# Altium PCB PCB1.PcbDoc
Units mil, origin at the board's own origin, x right, y up, seen from the top; angles counter-clockwise.
Board outline 6000 x 4000 mil, 2 copper layers (Top Layer, Bottom Layer); 16 components, 9 nets, 78 pads, 0 vias.
Unrouted connection lines stored in the file: 20.
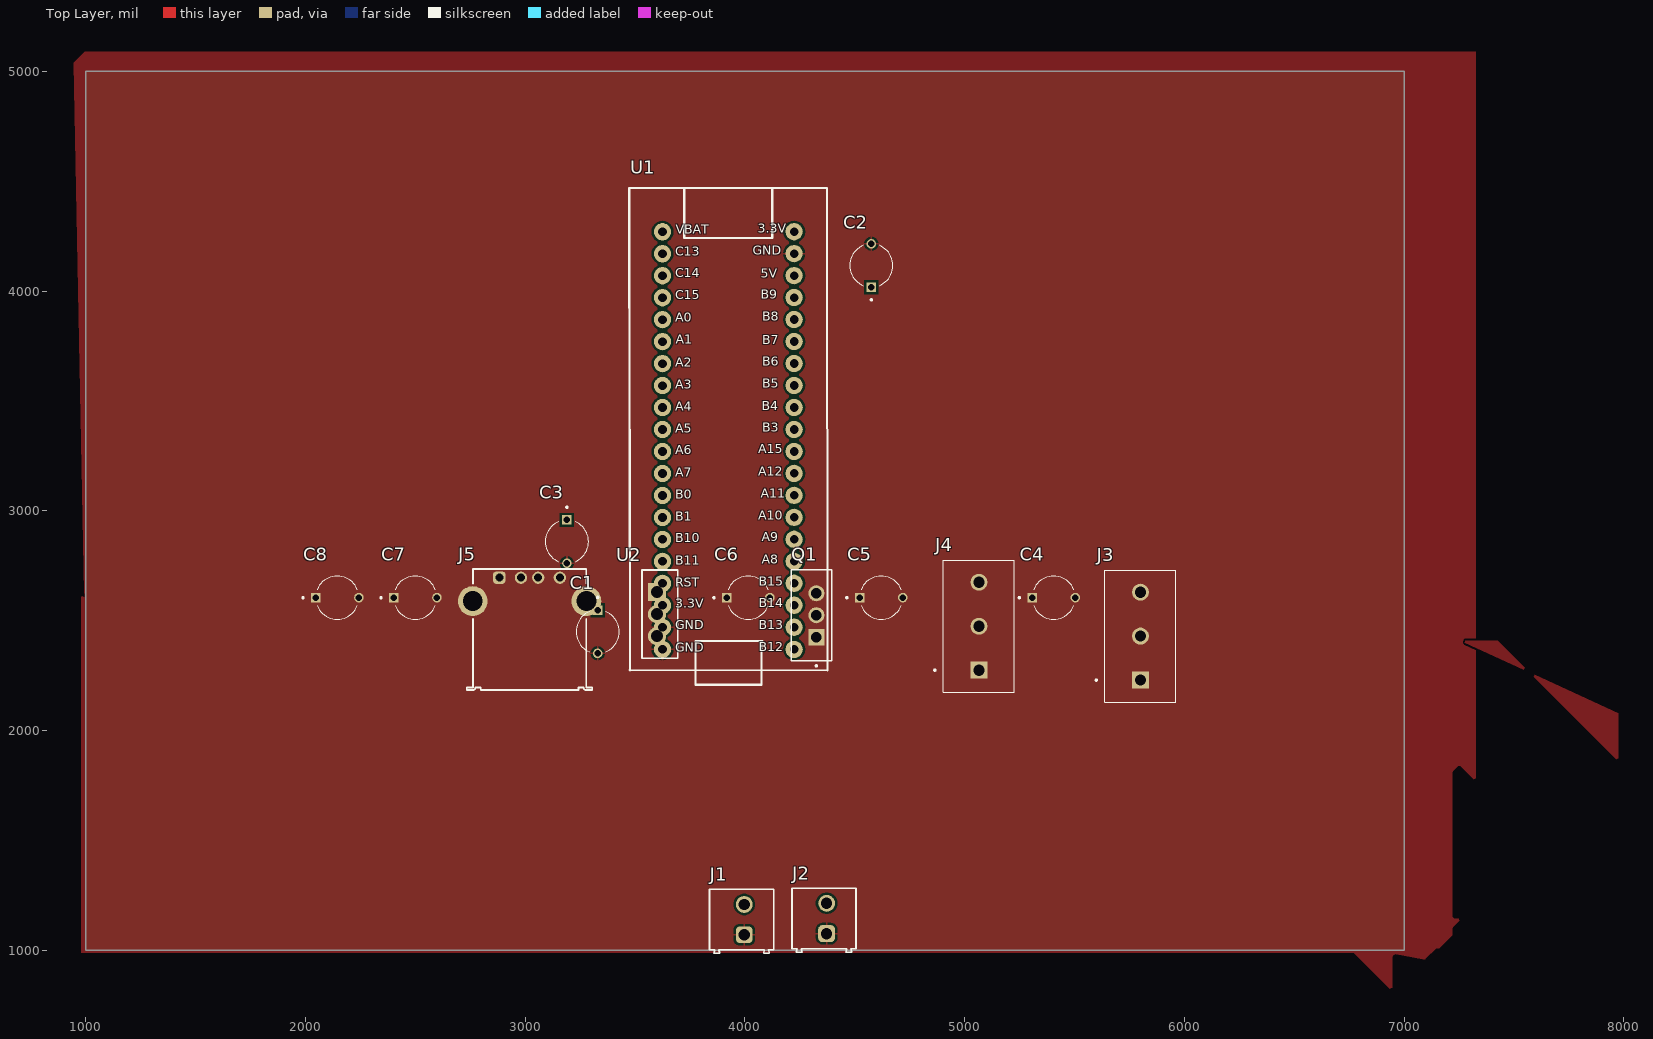
[diagram p0: Top Layer view]
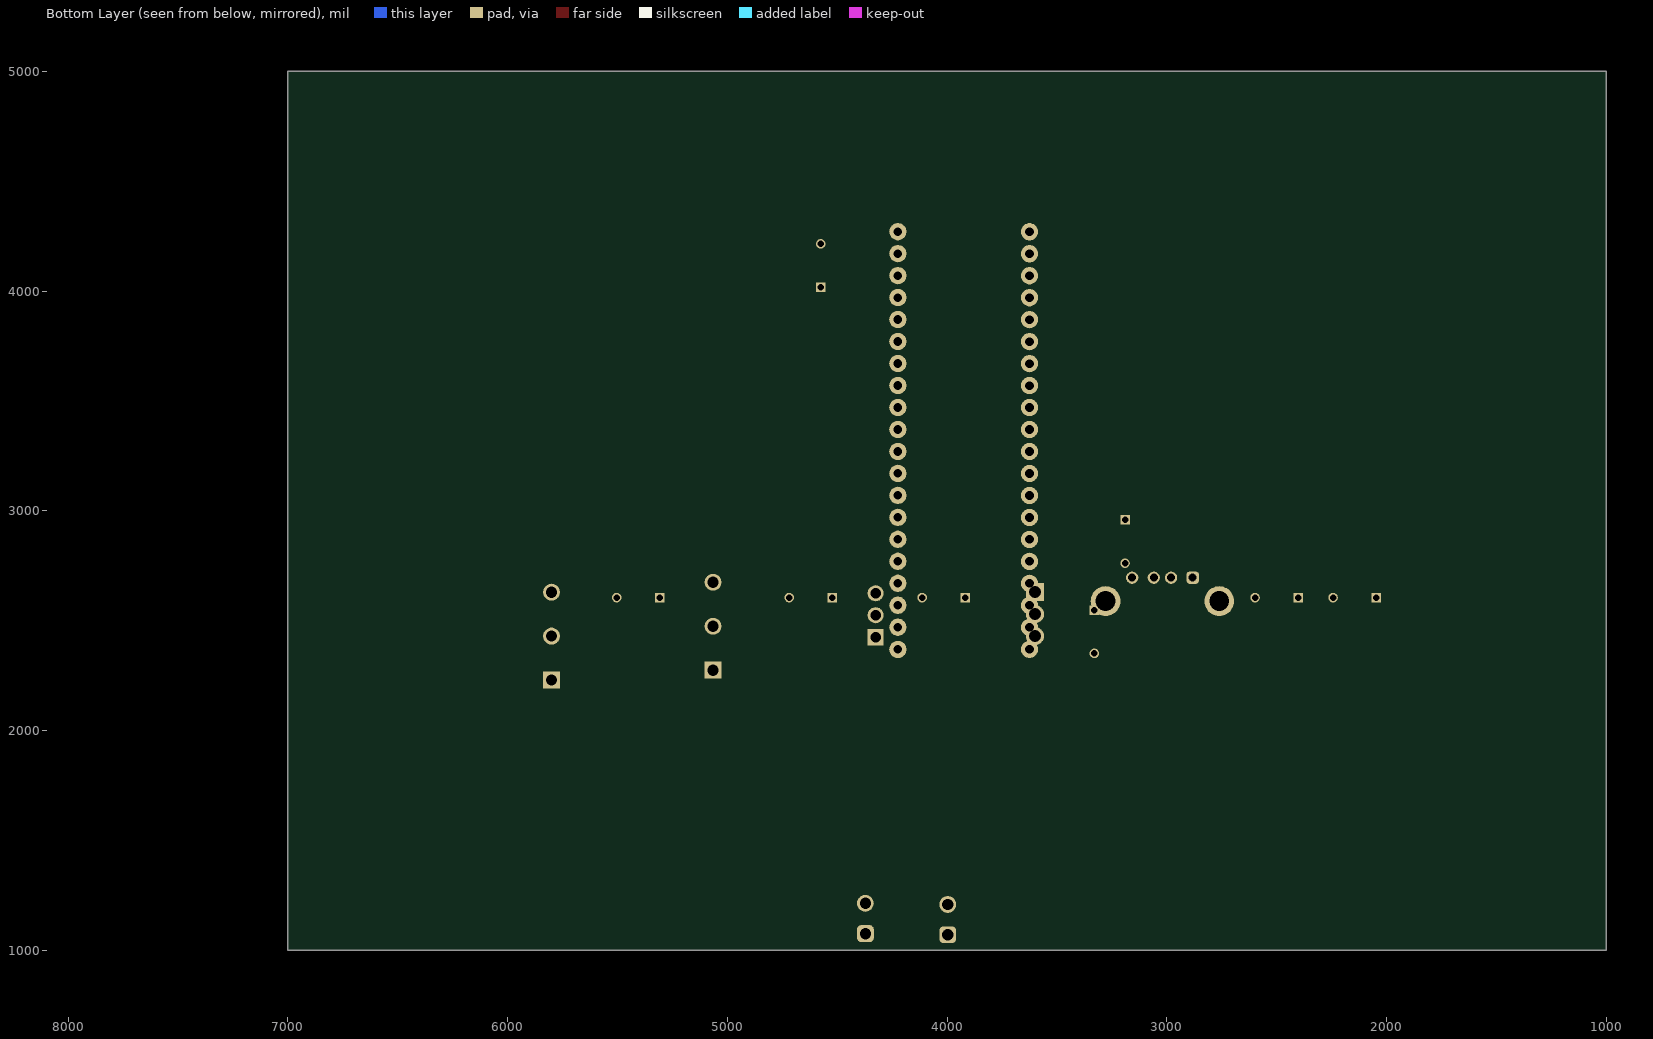
[diagram p1: Bottom Layer view, seen from below]

## Layer stack, top to bottom
Top Solder: solder mask 0.4, Solder Resist, Dk 3.5
Top Layer: signal copper 1.4
Dielectric 1: dielectric 12.6, FR-4, Dk 4.8
Bottom Layer: signal copper 1.4
Bottom Solder: solder mask 0.4, Solder Resist, Dk 3.5

## Board outline
1000,1000 7000,1000 7000,5000 1000,5000

## Design rules (kind name [scope] priority, off if disabled: settings)
Clearance [All] p1: gap=10 ignorepadtopadclearanceinfootprint=FALSE
PolygonConnect [All] p1: connectstyle=Relief reliefconductorwidth=10 reliefentries=4 polygonreliefangle="90 Angle" airgapwidth=10
RoutingVias [All] p1: holewidth=28 width=50 viastyle="Through Hole" minholewidth=28 minwidth=50 maxholewidth=28 maxwidth=50
SolderMaskExpansion [All] p1: expansion=4 istentingtop=FALSE
SupplyNets "Schematic Supply Nets_4" [InNet('+12')] p1: voltage=0.000
SupplyNets "Schematic Supply Nets_3" [InNet('8.4V')] p2: voltage=0.000
SupplyNets "Schematic Supply Nets_2" [InNet('+5')] p3: voltage=0.000
SupplyNets "Schematic Supply Nets_1" [InNet('3.3V')] p4: voltage=0.000
SupplyNets "Schematic Supply Nets" [InNet('GND')] p5: voltage=0.000
Width [All] p1: maxlimit=10 minlimit=10 preferedwidth=10
30 further rules are at their usual default settings.

## Components (designator, comment, footprint, x,y, rotation, side; value= is the part's Value field where it differs from the comment)
C1 "EEUFS1J270B" CAPPRD500W50D500H1100 3330,2450 r270 top
C2 "EEUFS1J270B" CAPPRD500W50D500H1100 4575,4116.57 r90 top
C3 "EEUFS1J270B" CAPPRD500W50D500H1100 3190,2860 r270 top
C4 "EEUFS1J270B" CAPPRD500W50D500H1100 5405,2605 r0 top
C5 "EEUFS1J270B" CAPPRD500W50D500H1100 4620,2605 r0 top
C6 "EEUFS1J270B" CAPPRD500W50D500H1100 4015,2605 r0 top
C7 "EEUFS1J270B" CAPPRD500W50D500H1100 2500,2605 r0 top
C8 "EEUFS1J270B" CAPPRD500W50D500H1100 2145,2605 r0 top
J1 "691214110002" 691214110002 3985,1140 r90 top
J2 "691214110002" 691214110002 4360,1145 r90 top
J3 "TB006-508-03BE" CUI_TB006-508-03BE 5800,2230 r90 top
J4 "TB006-508-03BE" CUI_TB006-508-03BE 5065,2275 r90 top
J5 "61400416021" 61400416021 3020,2460 r0 top
Q1 "LM7805CT/NOPB" TO254P1054X470X2600-3 4325,2425 r90 top
U1 "STM32F103C8T6" "Stm32 BluePill" 3915.8,3546.93 r0 top
U2 "LM7809ACT" TO254P470X1016X1879-3P 3600,2630 r0 top

## Footprints (in the part's own frame and the unit in brackets; to place one, negate y for a bottom-side part, rotate by r counter-clockwise, add the part's x,y. Pads: shape width x height; smd on the part's side, far side on the other; paste and mask are expansions set on the pad)
61400416021 [mm] "USB 2.0 Type A Horizontal"
  rrect50% 1.42x1.42 hole 0.92: 1(-3.5,5.99)
  round 1.42 hole 0.92: 2(-1,5.99) 3(1,5.99) 4(3.5,5.99)
  round 3.45 hole 2.3: Shell(-6.57,3.28) Shell(6.57,3.28)
  silkscreen extent -7.25,-7 7.25,7, body extent -8,-7 8,7, height 7.63
691214110002 [mm] "3.50 mm Horizontal Entry Modular, 2p"
  rrect50% 1.95x1.95 hole 1.3: 1(-1.75,-0.3)
  round 1.95 hole 1.3: 2(1.75,-0.3)
  silkscreen extent -3.9,-3.7 3.5,3.7, body extent -3.95,-3.7 3.5,3.7, height 8.55
CAPPRD500W50D500H1100 [mm]
  round 1.1 hole 0.75: N(2.5,0)
  rect 1.1x1.1 hole 0.75: P(-2.5,0)
  silkscreen extent -4.06,-2.5 2.32,2.5, body extent -2.75,-2.5 2.75,2.5, height 11
CUI_TB006-508-03BE [mm]
  rect 1.95x1.95 / inner round 1.95 / far side rect 1.95x1.95 hole 1.3: 1(0,0)
  round 1.95 hole 1.3: 2(5.08,0) 3(10.16,0)
  silkscreen extent -2.54,-4.1 12.7,5.2, body extent -3.04,-4.1 12.7,4.1, height 10
"Stm32 BluePill" [mm]
  round 2 hole 1: 1(7.828,-29.909) 2(7.828,-27.343) 3(7.828,-24.803) 4(7.828,-22.263) 5(7.828,-19.723) 6(7.828,-17.183) 7(7.828,-14.643) 8(7.828,-12.103) 9(7.828,-9.563) 10(7.828,-7.023) 11(7.828,-4.483) 12(7.828,-1.943) 13(7.828,0.597) 14(7.828,3.137) 15(7.828,5.677) 16(7.828,8.217) 17(7.828,10.757) 18(7.828,13.297) 19(7.828,15.837) 20(7.828,18.377) 21(-7.386,18.366) 22(-7.386,15.826) 23(-7.386,13.286) 24(-7.386,10.746) 25(-7.386,8.206) 26(-7.386,5.666) 27(-7.386,3.126) 28(-7.386,0.586) 29(-7.386,-1.954) 30(-7.386,-4.494) 31(-7.386,-7.034) 32(-7.386,-9.574) 33(-7.386,-12.114) 34(-7.386,-14.654) 35(-7.386,-17.194) 36(-7.386,-19.734) 37(-7.386,-22.274) 38(-7.386,-24.814) 39(-7.386,-27.354) 40(-7.386,-29.894)
  silkscreen extent -11.22,-34 11.69,23.43, body extent -11.18,-33.27 11.68,24.29, height 12.31
TO254P470X1016X1879-3P [mm]
  rect 2.1x2.1 / inner round 2.1 / far side rect 2.1x2.1 hole 1.4: 1(0,0)
  round 2.1 hole 1.4: 2(0,-2.54) 3(0,-5.08)
  silkscreen extent -1.75,-7.64 2.39,2.56, body extent -4.98,-1.76 4.98,2.69, height 19.68
TO254P1054X470X2600-3 [mm]
  rect 1.86x1.86 / inner round 1.86 / far side rect 1.86x1.86 hole 1.24: 1(0,0)
  round 1.86 hole 1.24: 2(2.54,0) 3(5.08,0)
  silkscreen extent -3.41,-1.8 7.81,2.9, body extent -5.08,-1.64 5.08,2.72, height 20.4

## Part data
C1 C2 C3 C4 C5 C6 C7 C8: "CAP ALUM 27UF 20% 63V THRU HOLE", Package="RADIAL-2 Panasonic", Availability="In Stock", Check_prices=https://www.snapeda.com/parts/EEU-FS1J270B/Panasonic%20Electronic%20Components/view-part/3211392/?ref=eda, MF="Panasonic Electronic Components", MP=EEU-FS1J270B, Price=None, SnapEDA_Link=https://www.snapeda.com/parts/EEU-FS1J270B/Panasonic%20Electronic%20Components/view-part/3211392/?ref=snap
J1 J2: library part CMP-1502-02464-2, Color="Blue, Green", Current=10A, Max Operating Temperature=105°C, Min Operating Temperature=-40°C, Voltage=300V, Contact Material=Brass, Contact Plating="Brass, Tin", Current Rating=10A, Height=8.7mm, Housing Material=Nylon, Lead Pitch=3.5mm, Length=7.4mm, Mount="Through Hole", NexarPartId=18818288, Number of Contacts=2, Number of Levels=1, Number of Pins=2, Number of Positions Per Level=2, Number of Rows=1, Packaging=Box, Pitch=3.5052mm, Plating="Brass, Steel", REACH SVHC=Unknown, RoHS=Compliant, Stripping Length=-6mm, Termination=Screw, Voltage Rating=300V, Width=7.9mm, Wire Gauge (Max)=24AWG, Wire Gauge (Min)=16AWG, Wire/Cable Gauge=24AWG
J3 J4: "2~24 Poles, Screw Type, Horizontal, 5.08 Pitch, 26~14 (AWG), Terminal Block Connector", Package=None, Availability="In Stock", Check_prices=https://www.snapeda.com/parts/TB006-508-03BE/CUI+Devices/view-part/?ref=eda, CUI_purchase_URL=https://www.cuidevices.com/product/interconnect/connectors/terminal-blocks/tb006-508-series?utm_source=snapeda.com&utm_medium=referral&utm_campaign=snapedaBOM, MF="CUI Devices", MP=TB006-508-03BE, Price=None, Purchase-URL=https://pricing.snapeda.com/search/part/TB006-508-03BE/?ref=eda, SnapEDA_Link=https://www.snapeda.com/parts/TB006-508-03BE/CUI+Devices/view-part/?ref=snap
J5: library part CMP-1502-03227-2, Color=White, Contact Resistance=20mΩ, Current Rating=1.5A, Flammability Rating="UL94 V-0", Insulation Resistance=1GΩ, Max Operating Temperature=105°C, Min Operating Temperature=-40°C, Operating Supply Voltage=30V, Connector Type=USB, Contact Material=Copper, Contact Plating=Gold, Gender=Receptacle, Insulation Material=PBT, Lead Free="Lead Free", Length=15.8mm, Mount="Horizontal, Through Hole", NexarPartId=21041530, Number of Contacts=4, Number of Pins=4, Number of Ports=1, Number of Positions=4, Orientation=Horizontal, REACH SVHC=Unknown, RoHS=Compliant, Termination=Solder, USB Standard="USB 2.0", Voltage Rating=30V, Voltage Rating (DC)=30V, Width=14.4mm
Q1: "Linear Voltage Regulator IC Positive Fixed 1 Output 1.5A TO-220-3", Package="TO-220-3 ON Semiconductor", Availability="In Stock", Check_prices=https://www.snapeda.com/parts/LM7805CT/Onsemi/view-part/?ref=eda, MF="ON Semiconductor", MP=LM7805CT, Price=None, Purchase-URL=https://pricing.snapeda.com/search/part/LM7805CT/?ref=eda, SnapEDA_Link=https://www.snapeda.com/parts/LM7805CT/Onsemi/view-part/?ref=snap
U1: library part BluePill, "Designed By @Alixahedi"
U2: "Linear Voltage Regulator IC Positive Fixed 1 Output 1A TO-220-3", Package="TO-220-3 ON Semiconductor", Availability="In Stock", Check_prices=https://www.snapeda.com/parts/LM7809ACT/Onsemi/view-part/?ref=eda, MF="ON Semiconductor", MP=LM7809ACT, Price=None, Purchase-URL=https://pricing.snapeda.com/search/part/LM7809ACT/?ref=eda, SnapEDA_Link=https://www.snapeda.com/parts/LM7809ACT/Onsemi/view-part/?ref=snap

## Nets (pads, with @x,y where several pads share a name; then routed paths per layer and width w, separated by ;. In a path a pad name is that pad's centre, name@x,y a point inside that pad or via, vN(x,y) a via of type N, cw(c..) or ccw(c..) an arc to the next point about the centre after c; other vN are vias at no path point)
3.3V: C1.P C3.P J1.2 U1.20 U1.38
8.4V: C4.P C5.P J3.2 J4.2 U2.3
+5: C2.P C8.P J5.1 Q1.3 U1.18
+12: C6.P C7.P J2.2 Q1.1 U2.1
D+: J5.3 U1.8
D-: J5.2 U1.7
GND: C1.N C2.N C3.N C4.N C5.N C6.N C7.N C8.N J1.1 J2.1 J3.3 J4.3 J5.4 J5.Shell Q1.2 U1.19 U1.39 U1.40 U2.2
Pwm1: J3.1 U1.5
Pwm2: J4.1 U1.6
pads on no net: U1.1 U1.2 U1.3 U1.4 U1.9 U1.10 U1.11 U1.12 U1.13 U1.14 U1.15 U1.16 U1.17 U1.21 U1.22 U1.23 U1.24 U1.25 U1.26 U1.27 U1.28 U1.29 U1.30 U1.31 U1.32 U1.33 U1.34 U1.35 U1.36 U1.37

## Polygon pours and split planes (outlines as drawn)
no net on Top Layer "NONET_L01_P002" (solid, pour order 2): 7255,2410 7425,2410 7975,1860 7975,2080
GND on Top Layer "GND_L01_P000" (solid, pour order 0): 945,5040 995,5090 7325,5090 7325,1175 6955,805 6770,990 980,990 980,2610 995,2625 995,2605

## Text inside footprints (layer, text, board x,y; h text height)
J5: Top 3D Body "PCB Edge" at 2933.39,2136.38 h32
U1: Top Overlay "5V" at 4073,4046.7 h70; Top Overlay "B9" at 4073,3951.7 h70; Top Overlay "B8" at 4078,3851.7 h70; Top Overlay "3.3V" at 4058,4251.7 h70; Top Overlay "GND" at 4035.8,4152.7 h70; Top Overlay "A5" at 3683,3341.7 h70; Top Overlay "A2" at 3683,3642.93 h70; Top Overlay "A3" at 3683,3542.7 h70; Top Overlay "A4" at 3683,3440.93 h70; Top Overlay "RST" at 3683,2641.7 h70; Top Overlay "B10" at 3683,2843.7 h70; Top Overlay "B11" at 3683,2741.93 h70; Top Overlay "A6" at 3683,3243.7 h70; Top Overlay "A7" at 3683,3141.93 h70; Top Overlay "B0" at 3683,3041.7 h70; Top Overlay "B1" at 3683,2940.93 h70; Top Overlay "3.3V" at 3683,2544.7 h70; Top Overlay "B15" at 4063.4,2645.7 h70; Top Overlay "A8" at 4075.5,2746.7 h70; Top Overlay "A11" at 4072.2,3044.93 h70; Top Overlay "B3" at 4078,3345.7 h70; Top Overlay "A9" at 4076.7,2847.7 h70; Top Overlay "A15" at 4060.9,3247.7 h70; Top Overlay "A12" at 4060.9,3145.93 h70; Top Overlay "A10" at 4060.9,2945.7 h70; Top Overlay "VBAT" at 3685.86,4246.93 h70; Top Overlay "B5" at 4078,3546.7 h70; Top Overlay "B14" at 4062.2,2547.93 h70; Top Overlay "B7" at 4078,3744.93 h70; Top Overlay "B4" at 4076.7,3444.93 h70; Top Overlay "B6" at 4079.2,3647.7 h70; Top Overlay "C15" at 3683,3948.7 h70; Top Overlay "C13" at 3683,4147.7 h70; Top Overlay "C14" at 3683,4049.7 h70; Top Overlay "A0" at 3683,3847.7 h70; Top Overlay "A1" at 3685.8,3746.93 h70; Top Overlay "GND" at 3683,2446.7 h70; Top Overlay "B13" at 4063,2446.7 h70; Top Overlay "GND" at 3683,2345.7 h70; Top Overlay "B12" at 4063.4,2347.93 h70